# EAGLE board small (EAGLE 9.3.0)
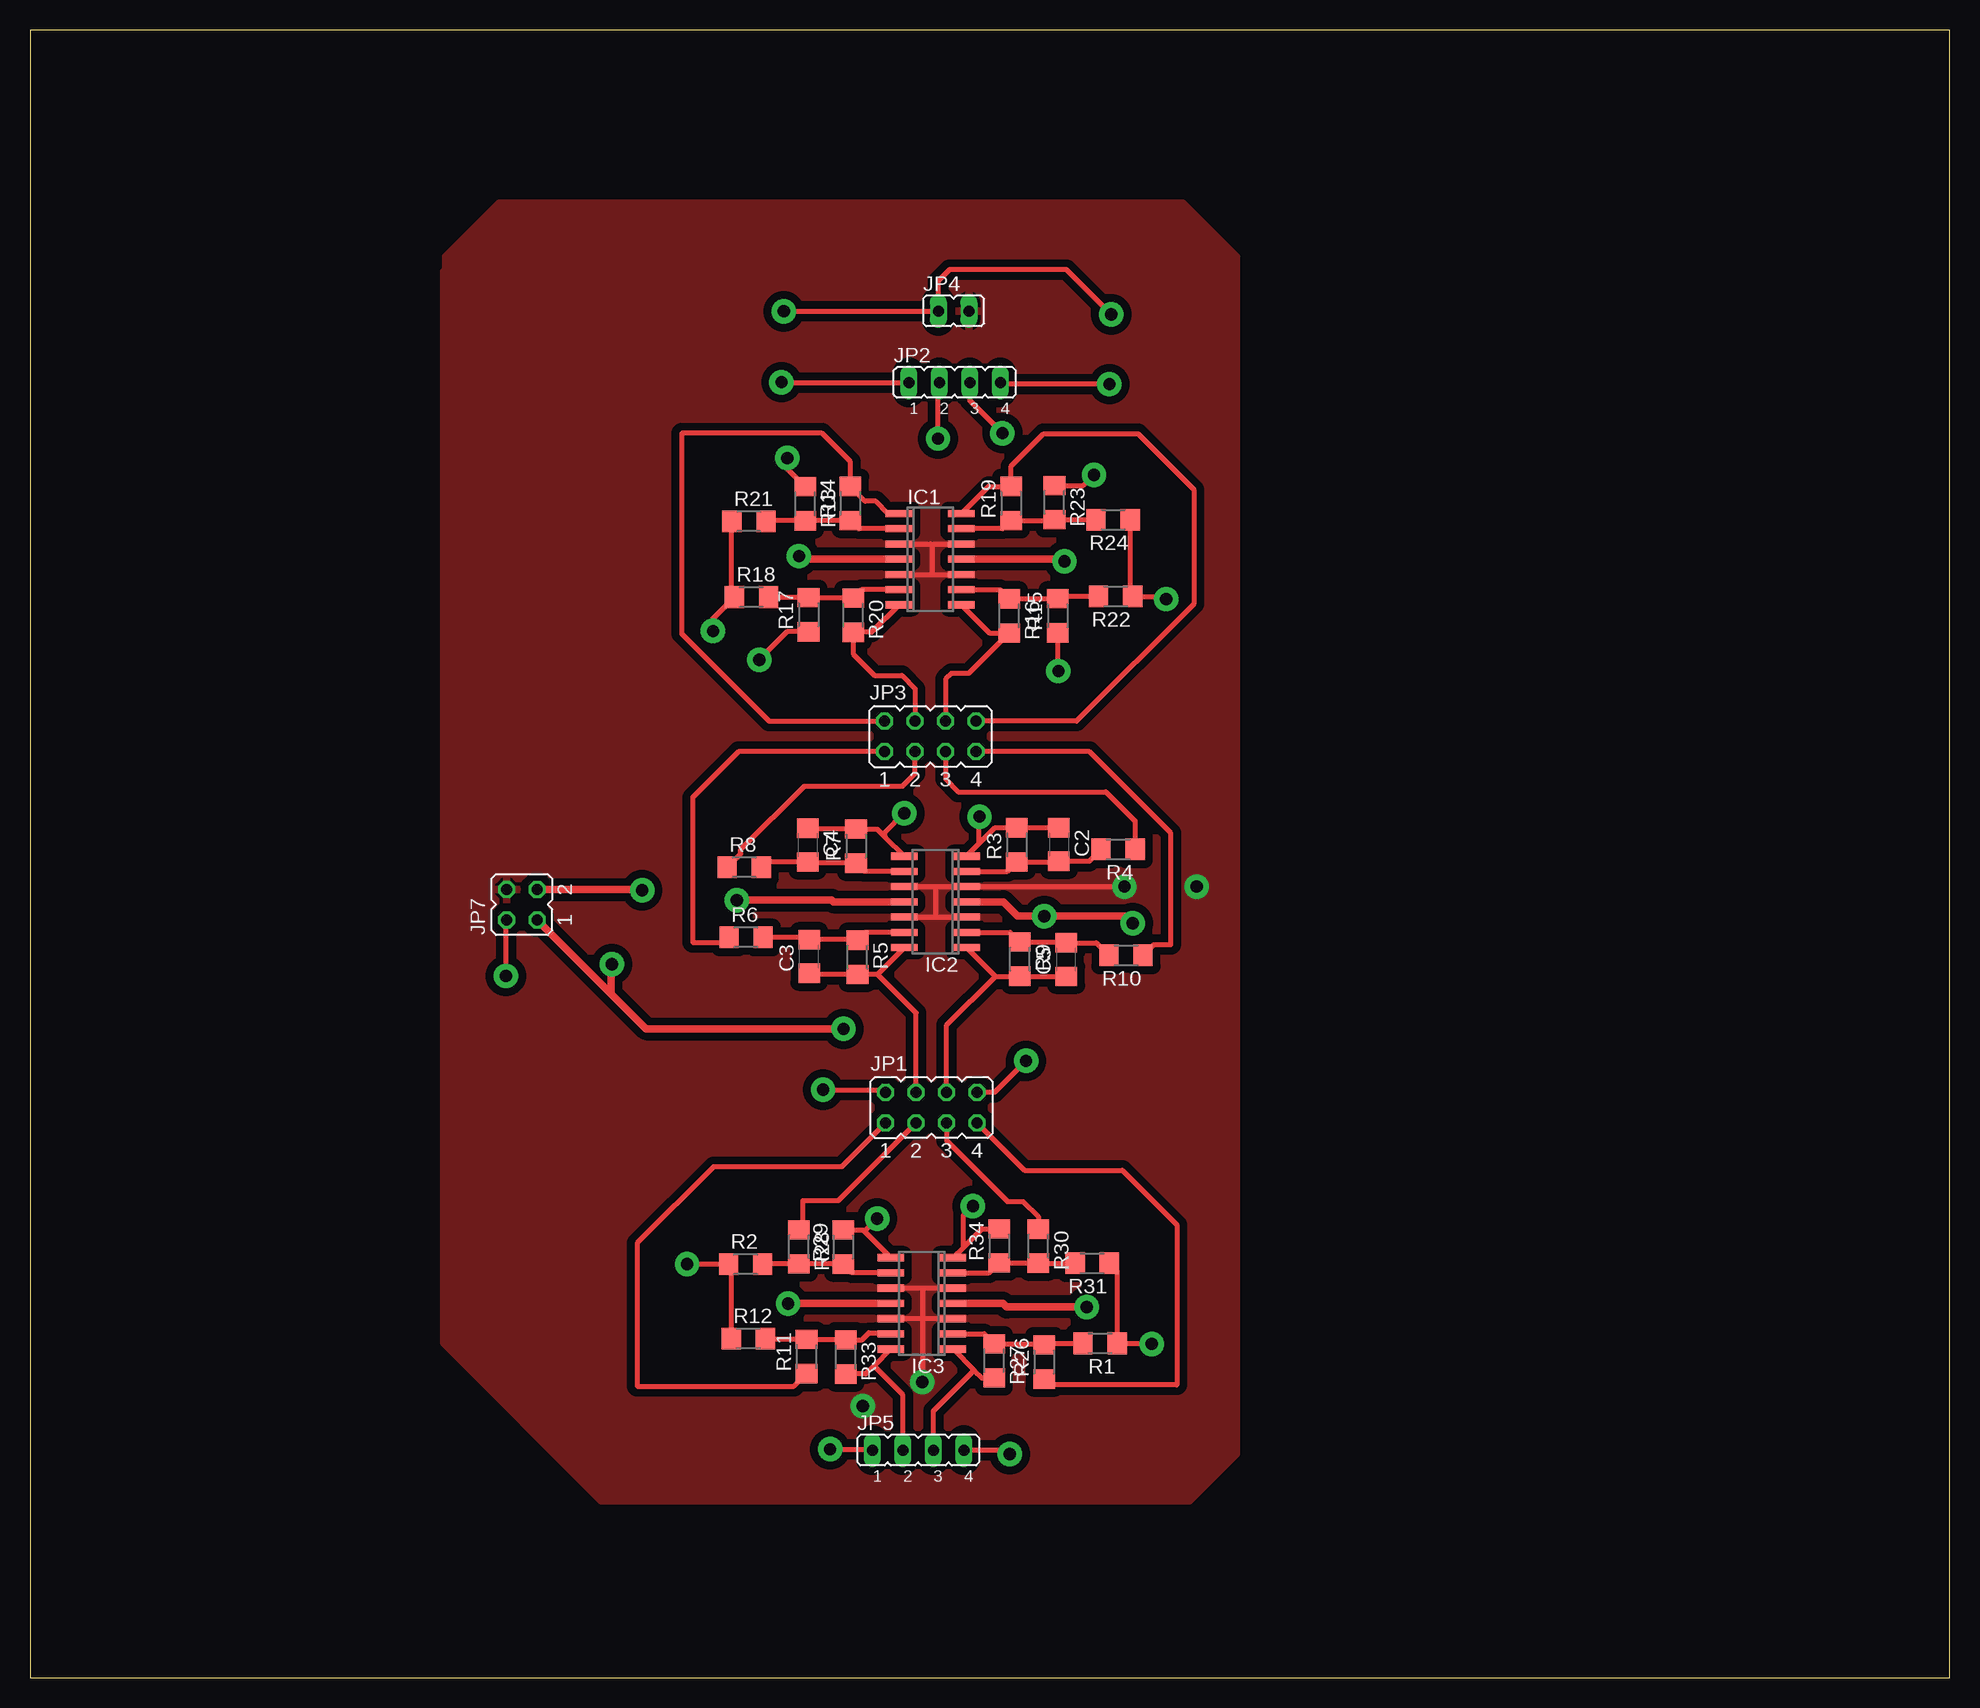
[diagram p0: board, top side]
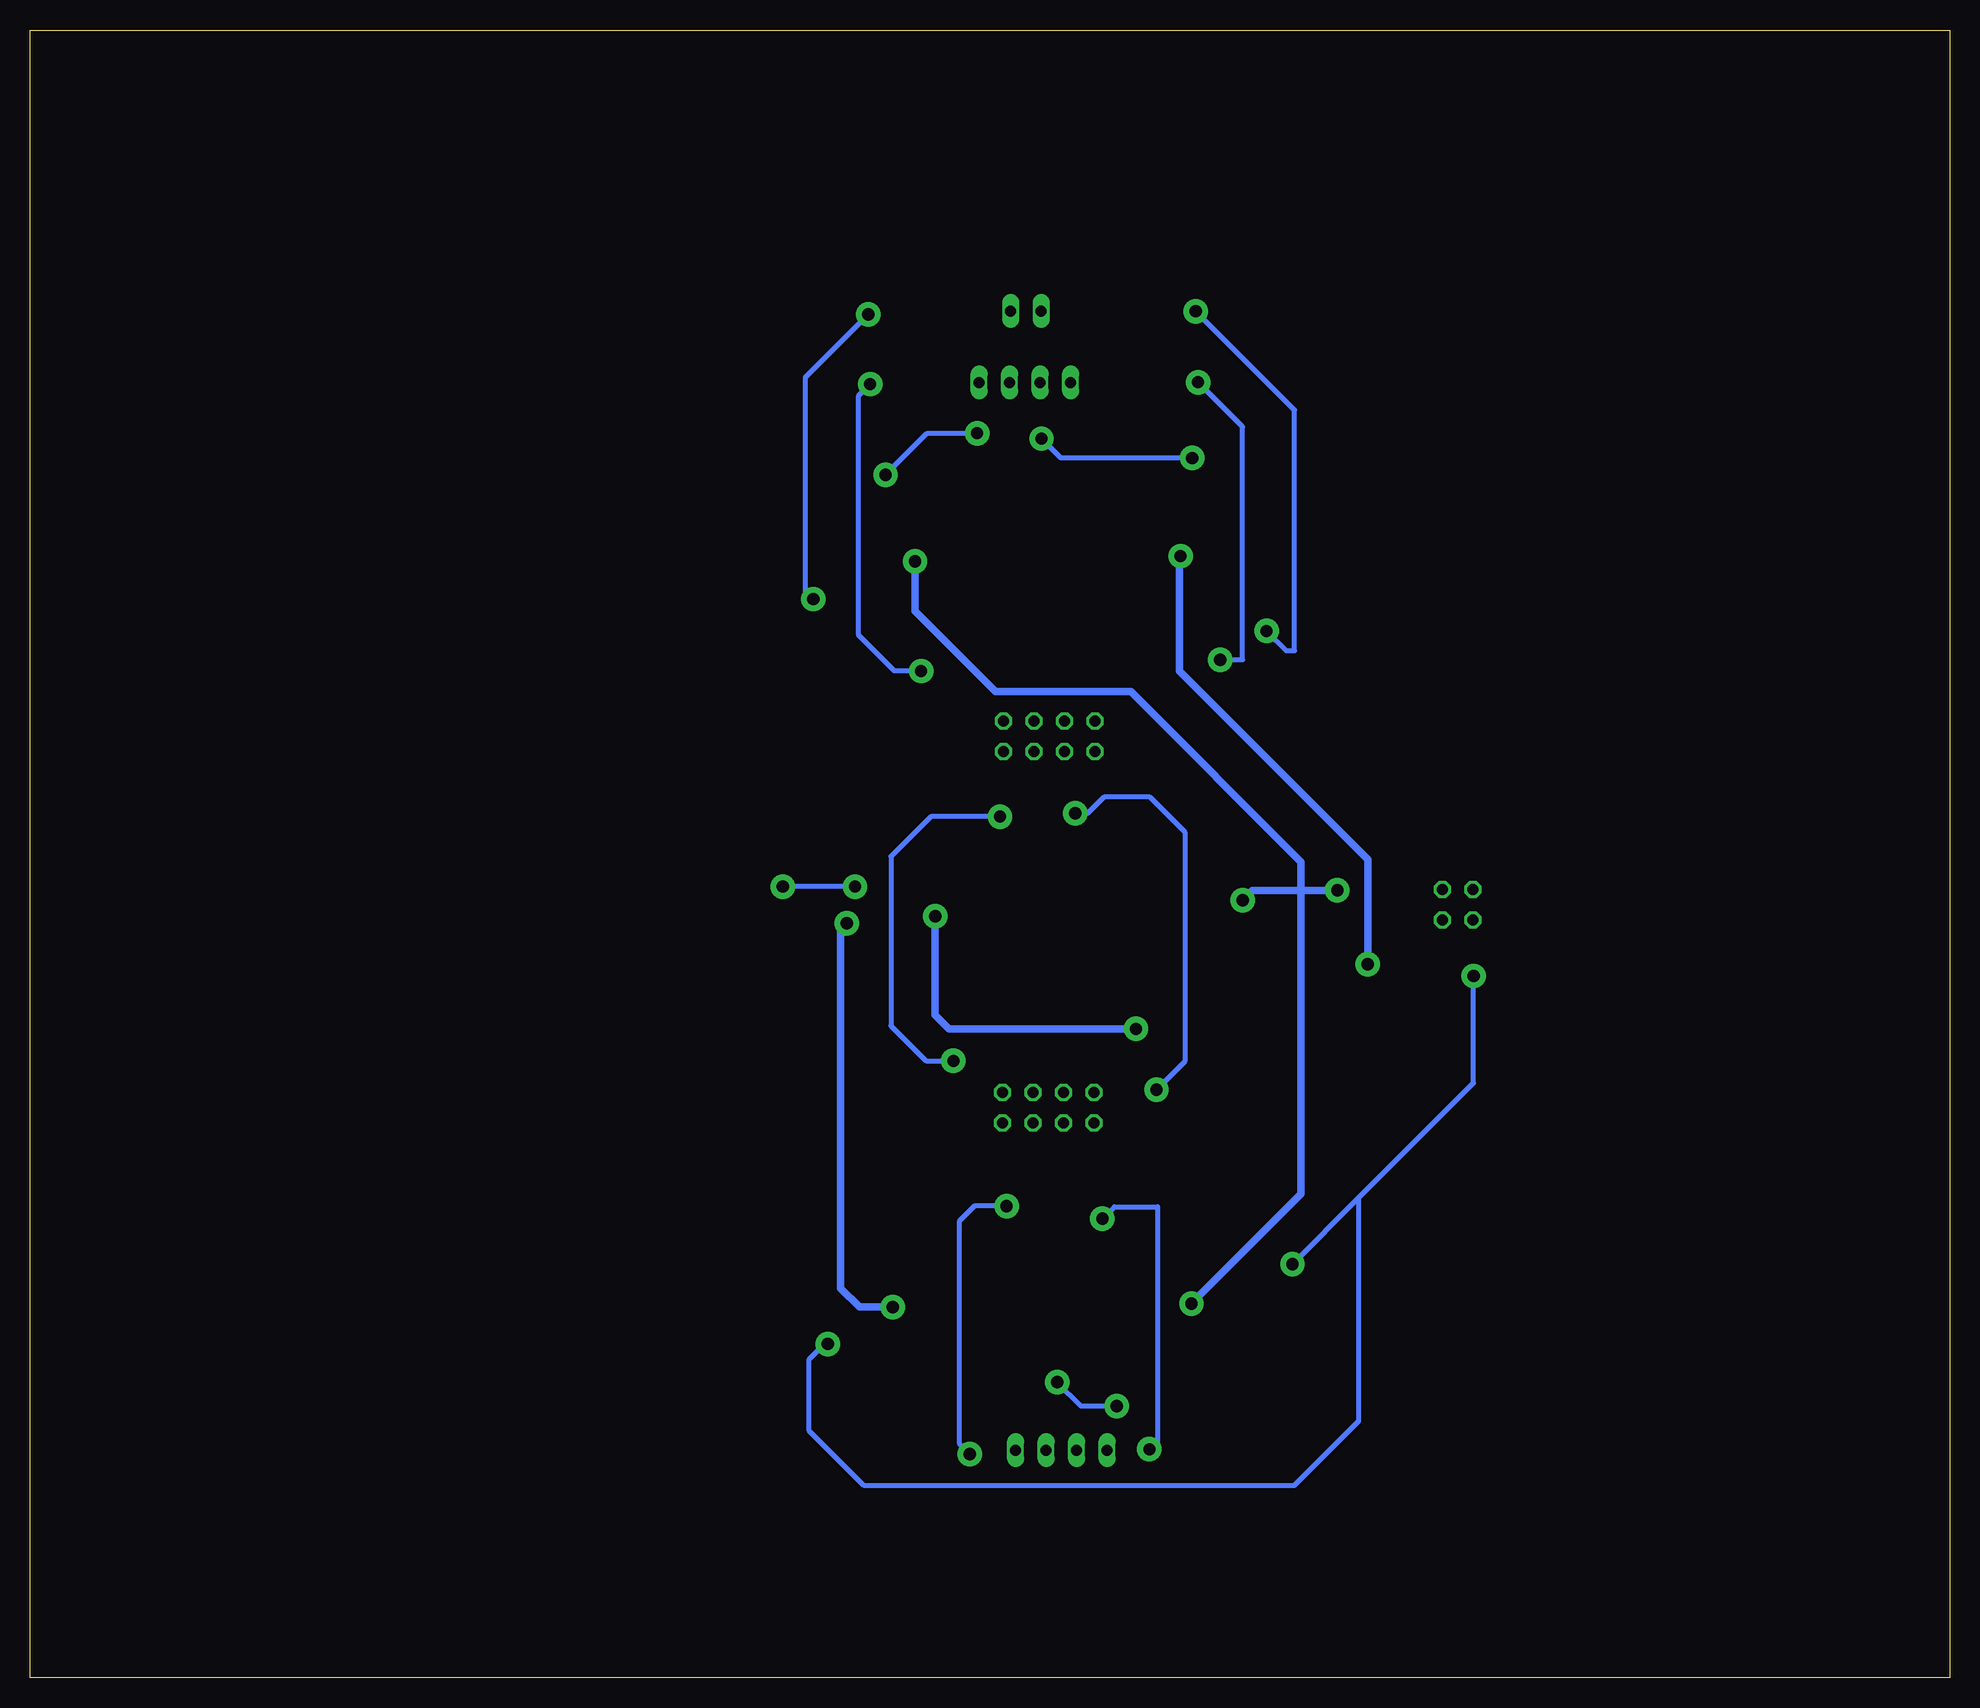
[diagram p1: board, bottom side, seen from below]

Size 160 x 137.34 mm. Coordinates in mm from the lower left corner, seen from the top.
Outline: 0,0 160,0 160,137.34 0,137.34 0,0
Copper layers (1*16): Top 0.035mm / dielectric 1.5mm / Bottom 0.035mm
Design rules "default *": minimum track width 16mil, minimum drill 30mil, track to track 26mil, track to pad 26mil, pad to pad 26mil, via to via 26mil, smd to smd 26mil, copper to edge 24mil, drill to drill 24mil, minimum pad ring 10mil, minimum via ring 8mil, stop-mask expansion 4mil, vias tented up to drill 0mil, thermal gap 10mil
Net classes: 1 power: width 0.254 mm

## Footprints (pad centres in the part's own frame; a part is rotated, then mirrored left to right if it is on the bottom)
C1206 = smd 1.6 x 1.8: 1 -1.4,0; 2 1.4,0
SO14 = smd 0.6 x 2.2: 1 -3.81,-2.6; 2 -2.54,-2.6; 3 -1.27,-2.6; 4 0,-2.6; 5 1.27,-2.6; 6 2.54,-2.6; 7 3.81,-2.6; 8 3.81,2.6; 9 2.54,2.6; 10 1.27,2.6; 11 0,2.6; 12 -1.27,2.6; 13 -2.54,2.6; 14 -3.81,2.6
JP4Q = drill 0.914 octagon: 1 -3.81,-1.27; 2 -3.81,1.27; 3 -1.27,-1.27; 4 -1.27,1.27; 5 1.27,-1.27; 6 1.27,1.27; 7 3.81,-1.27; 8 3.81,1.27
JP4 = drill 0.914 long: 1 -3.81,0; 2 -1.27,0; 3 1.27,0; 4 3.81,0
JP1 = drill 0.914 long: 1 0,-1.27; 2 0,1.27
JP2Q = drill 0.914 octagon: 1 -1.27,-1.27; 2 -1.27,1.27; 3 1.27,-1.27; 4 1.27,1.27
R1206 = smd 1.6 x 1.803: 1 -1.422,0; 2 1.422,0

## Placement (x,y rotation side)
C2  [C1206]  85.76,69.44 270 top
C3  [C1206]  64.95,60.11 90 top
C4  [C1206]  64.82,69.4 270 top
C5  [C1206]  86.38,59.85 90 top
IC1  TL084D  [SO14]  75.03,93.22 270 top
IC2  TL084D  [SO14]  75.48,64.66 90 top
IC3  TL084D  [SO14]  74.34,31.2 90 top
JP1  [JP4Q]  75.14,47.52 0 top
JP2  [JP4]  77.08,107.96 0 top
JP3  [JP4Q]  75.06,78.45 0 top
JP4  [JP1]  76.99,113.91 270 top
JP5  [JP4]  74.04,18.96 0 top
JP7  [JP2Q]  41,64.44 90 top
R1  [R1206]  89.2,27.86 180 top
R2  [R1206]  59.65,34.46 0 top
R3  [R1206]  82.26,69.42 90 top
R4  [R1206]  90.7,69.04 180 top
R5  [R1206]  68.98,60.04 270 top
R6  [R1206]  59.69,61.7 0 top
R7  [R1206]  68.86,69.3 90 top
R8  [R1206]  59.54,67.54 0 top
R9  [R1206]  82.51,59.88 270 top
R10  [R1206]  91.35,60.2 180 top
R11  [R1206]  64.72,26.76 90 top
R12  [R1206]  59.87,28.26 0 top
R13  [R1206]  64.62,97.85 270 top
R14  [R1206]  68.38,97.88 90 top
R15  [R1206]  85.66,88.51 90 top
R16  [R1206]  81.62,88.5 270 top
R17  [R1206]  64.9,88.6 90 top
R18  [R1206]  60.13,90.07 0 top
R19  [R1206]  81.78,97.87 90 top
R20  [R1206]  68.61,88.55 270 top
R21  [R1206]  59.92,96.37 0 top
R22  [R1206]  90.49,90.12 180 top
R23  [R1206]  85.39,97.94 270 top
R24  [R1206]  90.29,96.51 180 top
R26  [R1206]  84.54,26.31 90 top
R27  [R1206]  80.36,26.4 270 top
R28  [R1206]  64.09,35.9 270 top
R29  [R1206]  67.78,35.89 90 top
R30  [R1206]  84.05,35.96 270 top
R31  [R1206]  88.54,34.54 180 top
R33  [R1206]  67.99,26.73 270 top
R34  [R1206]  80.78,35.98 90 top

## Library data of the parts
C2-C5 = rcl; SPICEPREFIX: C
IC1-IC3 = linear
JP1-JP5 JP7 = jumper
R1-R24 R26-R31 R33 R34 = rcl; SPICEPREFIX: R

## Nets
1V65: JP7.2 R1.1 R2.1 R12.1 R31.1
+5V: IC1.4 IC2.4 IC3.4 JP7.1
-1V65: JP4.1 R18.1 R21.1 R22.1 R24.1
-5V: IC1.11 IC2.11 IC3.11 JP7.3
ADC_IN1: IC3.1 JP5.3 R27.2
ADC_IN2: IC3.8 JP5.1 R29.2
ADC_IN3: IC3.7 JP5.4 R34.2
ADC_IN4: IC3.14 JP5.2 R33.2
CHAN_F1: JP2.2 R13.1
CHAN_F2: JP2.4 R15.1
CHAN_F3: JP2.1 R17.1
CHAN_F4: JP2.3 R23.1
GND [power]: IC1.3 IC1.5 IC1.10 IC1.12 IC2.3 IC2.5 IC2.10 IC2.12 IC3.3 IC3.5 IC3.10 IC3.12 JP4.2 JP7.4
INTEG_IN1: IC1.1 JP3.2 R14.2
INTEG_IN2: IC1.8 JP3.6 R16.2
INTEG_IN3: IC1.7 JP3.4 R20.2
INTEG_IN4: IC1.14 JP3.8 R19.2
INTEG_IN11: JP3.7 R10.1
INTEG_IN22: JP3.3 R8.1
INTEG_IN33: JP3.5 R4.1
INTEG_IN44: JP3.1 R6.1
N$1: IC1.2 R13.2 R14.1 R21.2
N$3: IC1.9 R15.2 R16.1 R22.2
N$4: C5.2 IC2.2 R9.1 R10.2
N$5: C2.2 IC2.6 R3.1 R4.2
N$6: IC1.13 R19.1 R23.2 R24.2
N$7: IC1.6 R17.2 R18.2 R20.1
N$8: C3.2 IC2.13 R5.1 R6.2
N$9: C4.2 IC2.9 R7.1 R8.2
N$36: IC3.2 R1.2 R26.2 R27.1
N$38: IC3.9 R2.2 R28.2 R29.1
N$42: IC3.13 R11.2 R12.2 R33.1
N$43: IC3.6 R30.2 R31.2 R34.1
VIN1: C5.1 IC2.1 JP1.6 R9.2
VIN2: C4.1 IC2.8 JP1.2 R7.2
VIN3: C2.1 IC2.7 JP1.8 R3.2
VIN4: C3.1 IC2.14 JP1.4 R5.2
VIN11: JP1.7 R26.1
VIN22: JP1.3 R28.1
VIN33: JP1.5 R30.1
VIN44: JP1.1 R11.1

## Tracks (layer width: path | path; a pad name or v marks a point on that pad's centre or on a via)
1V65  (via drill 1.02 pad 2.03)
  Top 0.406: R12.1 58.45,34.24 R2.1 v54.78,34.46 v54.77,34.45 | R31.1 90.62,33.88 R1.1 90.67,27.81 v93.5,27.81 | v39.67,58.49 39.67,63.1 JP7.2
  Bottom 0.406: v54.77,34.45 49.26,39.97 | 49.26,39.97 39.67,49.56 v39.67,58.49 | 49.26,39.97 49.26,21.37 54.63,15.99 90.46,15.99 95.06,20.59 95.06,26.52 93.77,27.81 v93.5,27.81
+5V  (via drill 1.02 pad 2.03)
  Top 0.61: JP7.1 48.44,57 | 48.44,57 51.36,54.07 v67.81,54.07 | v91.92,62.88 91.34,63.47 v84.54,63.47 82.32,63.47 81.13,64.66 IC2.4 | v88.08,30.89 81.4,30.89 81.09,31.2 IC3.4 | 48.44,57 48.44,59.4 v48.5,59.46 | v64.09,93.48 64.34,93.23 IC1.4
  Bottom 0.61: v67.81,54.07 83.38,54.07 84.54,55.24 v84.54,63.47 | v91.92,62.88 92.42,62.39 92.42,32.43 90.87,30.89 v88.08,30.89 | v48.5,59.46 48.5,68.2 64.18,83.88 64.18,93.39 v64.09,93.48
-1V65  (via drill 1.02 pad 2.03)
  Top 0.406: R24.1 91.71,90.33 R22.1 94.49,90.12 v94.71,89.9 | R21.1 58.5,90.28 R18.1 56.93,88.28 v56.93,87.24 | v62.84,113.89 75.69,113.89 | 75.69,113.89 JP4.1 | v90.13,113.63 86.4,117.36 76.65,117.36 75.69,116.41 75.69,113.89
  Bottom 0.406: v56.93,87.24 55.28,85.6 54.6,85.6 54.6,105.66 v62.84,113.89 | v94.71,89.9 95.37,90.56 95.37,108.38 v90.13,113.63
-5V  (via drill 1.02 pad 2.03)
  Top 0.61: JP7.3 50.95,65.71 v51.03,65.63 | v58.92,64.8 66.83,64.8 66.97,64.66 IC2.11 | IC2.11 | IC3.11 63.2,31.2 v63.19,31.18 | v86.23,93.05 86.06,93.22 77.7,93.22 77.69,93.22 IC1.11
  Bottom 0.61: v51.03,65.63 54.04,65.63 | 54.04,65.63 58.09,65.63 v58.92,64.8 | v63.19,31.18 54.04,40.32 54.04,65.63 | 54.04,65.63 54.04,68 68.24,82.2 79.52,82.2 86.23,88.91 v86.23,93.05
ADC_IN1
  Top 0.406: IC3.1 78.7,25.62 | 78.7,25.62 79.35,24.98 R27.2 | JP5.3 75.31,22.23 78.7,25.62
ADC_IN2  (via drill 1.02 pad 2.03)
  Top 0.406: v70.61,38.26 69.67,37.31 R29.2 69.44,37.31 IC3.8 | v66.7,19.03 70.16,19.03 JP5.1
  Bottom 0.406: v70.61,38.26 69.62,39.25 66,39.25 66,19.73 v66.7,19.03
ADC_IN3  (via drill 1.02 pad 2.03)
  Top 0.406: IC3.7 77.81,35.87 | 77.81,35.87 79.34,37.41 R34.2 | 77.81,35.87 77.81,38.52 v78.59,39.3 | v81.66,18.64 81.34,18.96 JP5.4
  Bottom 0.406: v78.59,39.3 81.27,39.3 82.56,38.01 82.56,19.53 v81.66,18.64
ADC_IN4
  Top 0.406: IC3.14 70.34,25.98 | 70.34,25.98 69.66,25.3 R33.2 | JP5.2 72.77,23.55 70.34,25.98
CHAN_F1  (via drill 1.02 pad 2.03)
  Top 0.406: R13.1 63.13,100.75 v63.13,101.66 | v75.68,103.27 75.68,107.84 JP2.2
  Bottom 0.406: v63.13,101.66 74.07,101.66 v75.68,103.27
CHAN_F2  (via drill 1.02 pad 2.03)
  Top 0.406: R15.1 85.66,83.97 v85.72,83.9 | v89.97,107.81 81.03,107.81 JP2.4
  Bottom 0.406: v85.72,83.9 87.95,83.9 90.94,86.89 90.94,106.85 v89.97,107.81
CHAN_F3  (via drill 1.02 pad 2.03)
  Top 0.406: R17.1 63.12,87.18 v60.79,84.84 | v62.64,107.98 62.65,107.96 JP2.1
  Bottom 0.406: v60.79,84.84 58.93,84.84 58.93,104.28 v62.64,107.98
CHAN_F4  (via drill 1.02 pad 2.03)
  Top 0.406: R23.1 87.8,99.37 v88.69,100.26 | v81.05,103.72 78.35,106.43 JP2.3
  Bottom 0.406: v88.69,100.26 85.22,103.72 v81.05,103.72
GND  (via drill 1.02 pad 2.03)
  Top 0.406: IC1.3 75.09,94.49 | 75.09,94.49 IC1.12 | IC1.5 75.2,91.95 | 75.2,91.95 IC1.10 | IC3.10 74.34,32.47 | 74.34,32.47 IC3.5 | IC3.12 74.4,29.93 | 74.4,29.93 IC3.3 | IC2.10 75.45,65.93 | 75.45,65.93 IC2.5 v91.23,65.93 | IC2.12 75.49,63.39 | 75.49,63.39 IC2.3 | 75.45,65.93 75.49,65.89 75.49,63.39 | 75.09,94.49 75.2,94.38 75.2,91.95 | 74.34,32.47 74.4,32.41 74.4,30.23 74.4,29.93 | 74.4,29.93 74.4,24.65 v74.38,24.63
  Bottom 0.406: v91.23,65.93 v97.25,65.93 | v74.38,24.63 72.38,22.63 v69.42,22.63
  pour Top: 34.47,117.21 34.47,27.9 47.62,14.75 96.66,14.75 97.19,15.29 100.57,18.66 100.57,118.45 96.12,122.9 39.09,122.9 34.65,118.46 34.65,116.32
INTEG_IN1
  Top 0.406: IC1.1 71.54,97.03 70.51,98.07 69.61,98.07 R14.2 68.38,101.35 66.02,103.72 54.31,103.72 54.31,87.02 61.62,79.72 JP3.2
INTEG_IN2
  Top 0.406: IC1.8 79.97,87.08 R16.2 78.24,83.7 76.8,83.7 76.33,83.23 JP3.6
INTEG_IN3
  Top 0.406: IC1.7 70.15,87.13 R20.2 68.61,85.32 70.4,83.53 72.67,83.53 73.79,82.42 JP3.4
INTEG_IN4
  Top 0.406: IC1.14 79.89,99.29 R19.2 81.78,100.97 84.5,103.69 92.36,103.69 97.01,99.03 97.01,89.49 87.24,79.72 JP3.8
INTEG_IN11
  Top 0.406: R10.1 93.67,61.11 95.09,61.11 95.09,70.39 88.3,77.18 JP3.7
INTEG_IN22
  Top 0.406: R8.1 59.25,68.67 59.25,69.01 64.55,74.31 72.73,74.31 73.79,75.37 JP3.3
INTEG_IN33
  Top 0.406: JP3.5 76.33,74.88 77.37,73.84 89.68,73.84 92.12,71.4 R4.1
INTEG_IN44
  Top 0.406: JP3.1 59.06,77.18 55.25,73.36 55.25,61.29 57.86,61.29 R6.1
N$1
  Top 0.406: IC1.2 69.07,95.76 R14.1 64.65,96.45 R13.2 61.39,96.42 R21.2
N$3
  Top 0.406: R22.2 85.85,90.12 R15.2 R16.1 80.86,90.68 IC1.9
N$4
  Top 0.406: R10.2 88.88,61.25 C5.2 86.33,61.3 R9.1 81.69,62.12 IC2.2
N$5
  Top 0.406: IC2.6 81.46,67.2 R3.1 85.71,68 C2.2 88.27,68.04 R4.2
N$6
  Top 0.406: IC1.13 81.09,95.76 R19.1 85.32,96.45 R23.2 R24.2
N$7
  Top 0.406: R18.2 64.49,90.07 | 64.49,90.07 64.85,90.07 R17.2 | 64.49,90.07 64.58,89.97 R20.1 69.32,90.68 IC1.6
N$8
  Top 0.406: IC2.13 69.63,62.12 R5.1 68.94,61.51 C3.2 64.76,61.7 R6.2
N$9
  Top 0.406: IC2.9 69.54,67.2 R7.1 64.94,67.88 C4.2 61.42,68 R8.2
N$36
  Top 0.406: IC3.2 79.53,28.66 R27.1 84.44,27.82 R26.2 84.67,27.86 R1.2
N$38
  Top 0.406: IC3.9 68.51,33.74 R29.1 R28.2 61.09,34.47 R2.2
N$42
  Top 0.406: IC3.13 71.66,28.74 69.93,28.74 69.34,28.15 R33.1 64.76,28.15 R11.2 61.37,28.19 R12.2
N$43
  Top 0.406: IC3.6 79.95,33.74 R34.1 84.03,34.56 R30.2 R31.2
VIN1
  Top 0.406: C5.1 86.37,58.46 R9.2 80.47,58.46 | IC2.1 80.47,58.46 | JP1.6 76.41,54.4 80.47,58.46
VIN2  (via drill 1.02 pad 2.03)
  Top 0.406: C4.1 68.79,70.8 R7.2 70.62,70.73 71.27,70.08 | 71.27,70.08 IC2.8 | 71.27,70.08 71.27,70.45 v72.87,72.05 | v66.1,49 71.11,49 JP1.2
  Bottom 0.406: v72.87,72.05 71.82,72.05 70.43,73.44 66.7,73.44 63.73,70.47 63.73,51.37 v66.1,49
VIN3  (via drill 1.02 pad 2.03)
  Top 0.406: IC2.7 79.12,69.51 | 79.12,69.51 80.45,70.84 R3.2 C2.1 | 79.12,69.51 79.12,72.12 79.15,72.15 v79.15,71.77 | v83.03,51.41 80.4,48.79 JP1.8
  Bottom 0.406: v79.15,71.77 84.92,71.77 88.23,68.45 88.23,54.33 85.31,51.41 v83.03,51.41
VIN4
  Top 0.406: IC2.14 70.65,58.62 | 70.65,58.62 R5.2 65.04,58.62 C3.1 | JP1.4 73.87,55.4 70.65,58.62
VIN11
  Top 0.406: JP1.7 82.92,42.28 91.06,42.28 95.59,37.75 95.59,24.38 85.04,24.38 R26.1
VIN22
  Top 0.406: JP1.3 67.37,39.75 64.41,39.75 64.41,37.64 R28.1
VIN33
  Top 0.406: JP1.5 76.41,44.76 81.48,39.69 82.78,39.69 84.05,38.42 R30.1
VIN44
  Top 0.406: JP1.1 67.65,42.57 56.98,42.57 50.62,36.22 50.62,24.29 63.67,24.29 R11.1